# Allegro board display-002-119pm1510.brd
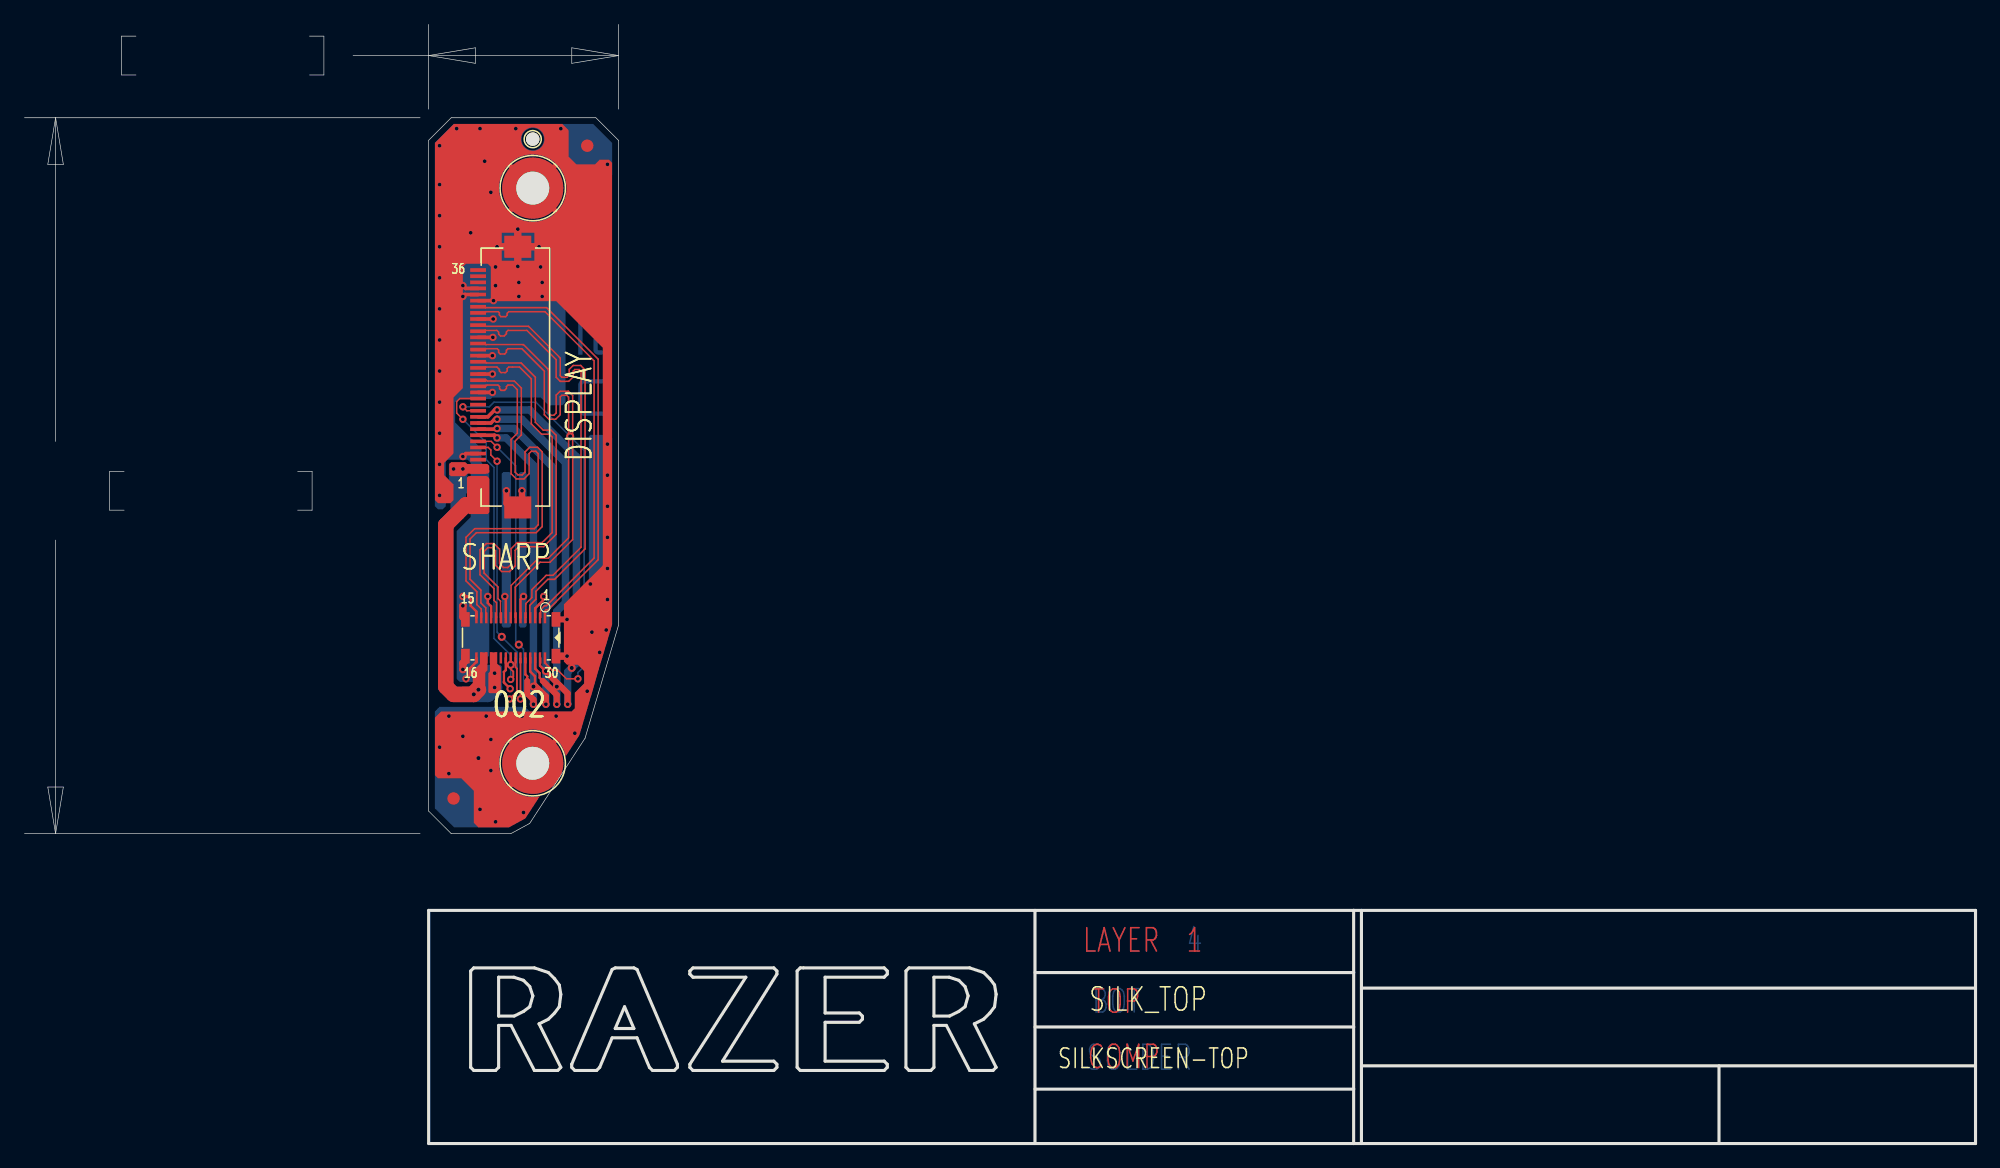
[diagram p0: board, top side]
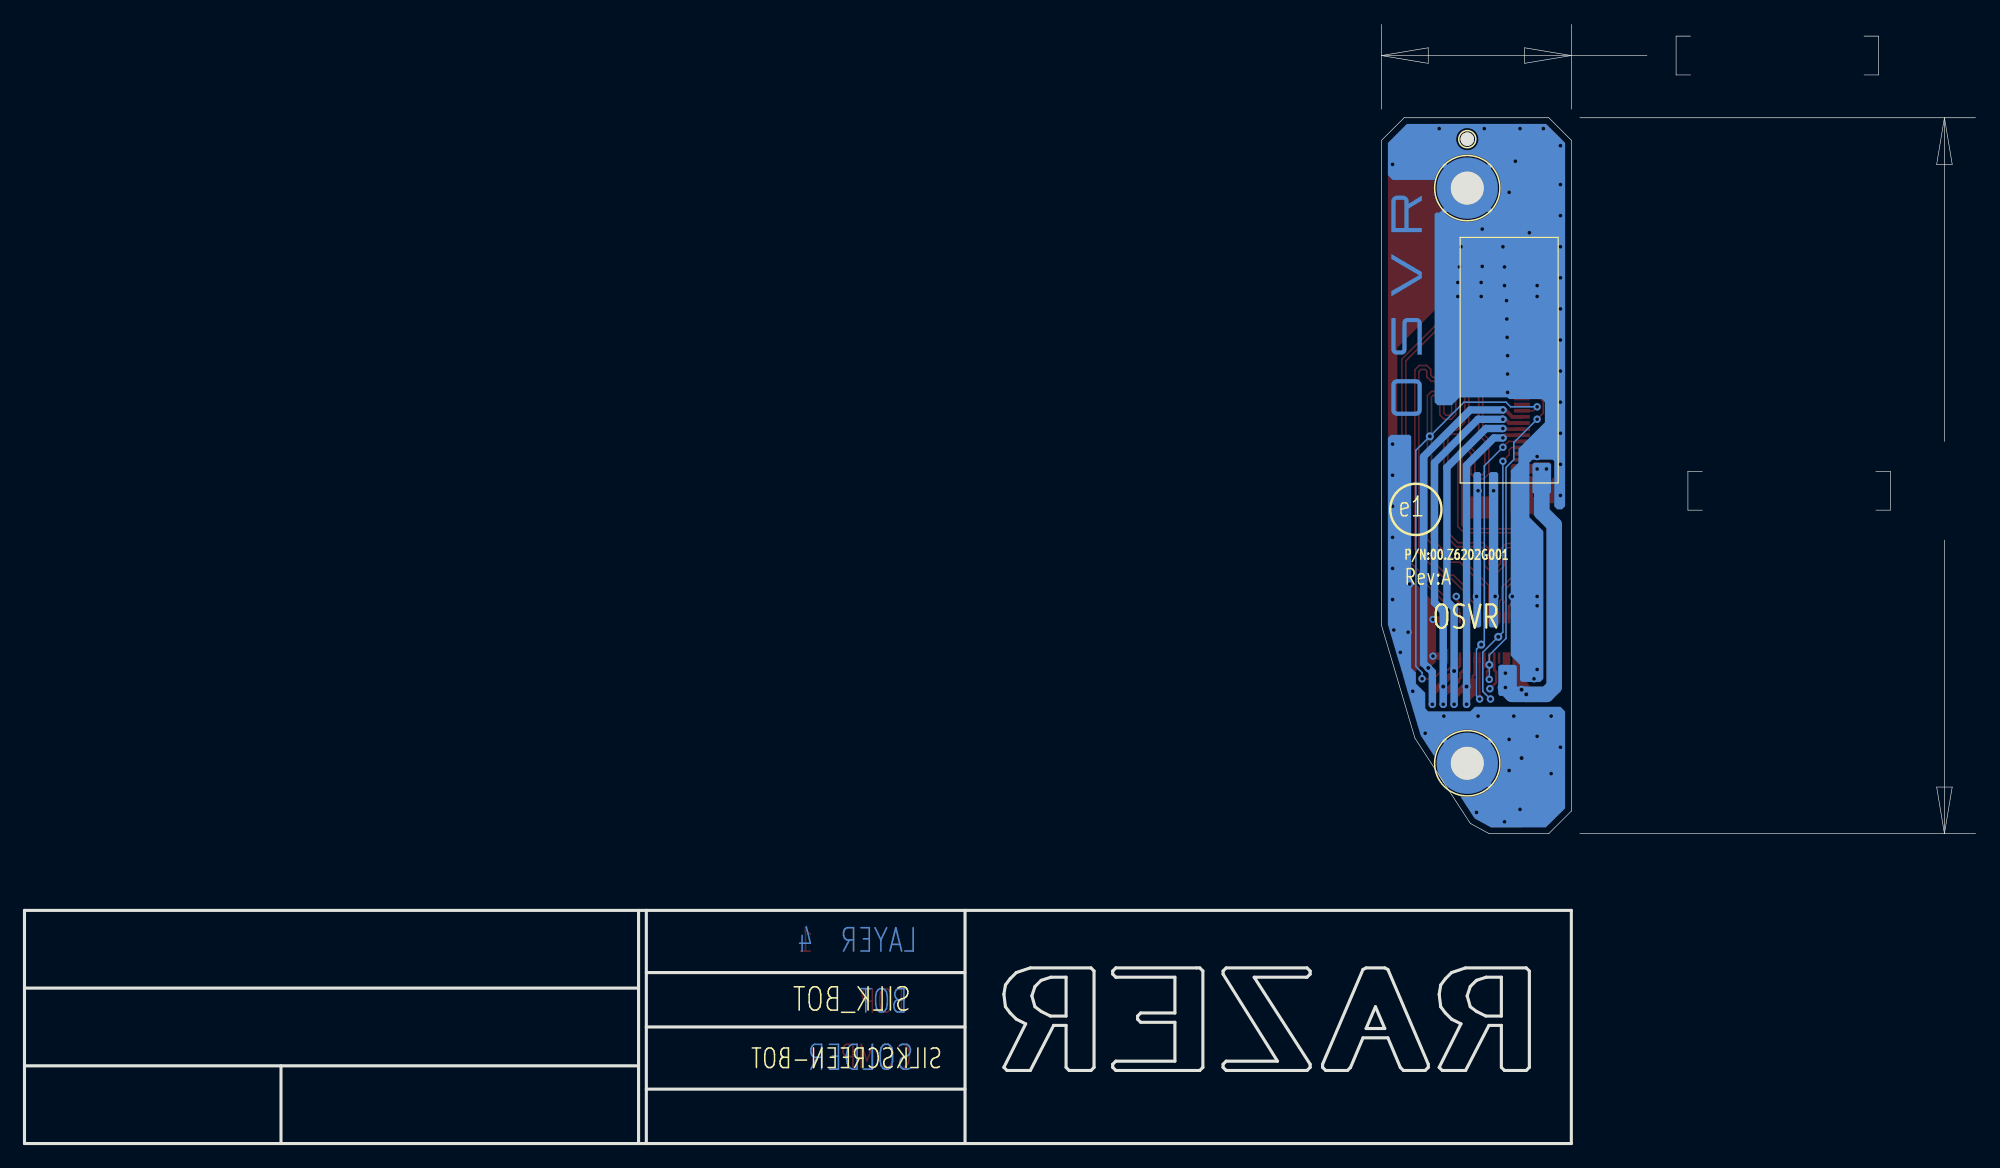
[diagram p1: board, bottom side, seen from below]

Outline 159.38 x 91.44 mm; copper layers: TOP, IN1, IN2, BOTTOM. Coordinates in mm from the lower left corner of the outline.
Outline path: 33.02,81.98 34.86,83.82 46.68,83.82 48.52,81.98 48.52,42.32 45.8,33.13 41.27,26.16 39.73,25.32 34.86,25.32 33.02,27.16 33.02,81.98

## Design rules (mm)
net group DIFFPAIR8: nets LCD1_DATAN3_T LCD1_DATAP3_T
net group DIFFPAIR9: nets LCD1_DATAN0_T LCD1_DATAP0_T
net group DIFFPAIR10: nets LCD1_CLKN_T LCD1_CLKP_T
net group DIFFPAIR11: nets LCD1_DATAN1_T LCD1_DATAP1_T
net group DIFFPAIR12: nets LCD1_DATAN2_T LCD1_DATAP2_T

## Placement (name value [footprint] x y rotation side)
J1001  FH12-36S-0.5SH(55)  [FH12-36S-0_5SH]  40.1 62.63 90 top
J1002  -  [AXT530124]  39.72 41.32 270 top
MT1001  MOUNTING HOLE  [HOLEC197D106]  41.52 78.07 0 top
MT1002  MOUNTING HOLE  [HOLEC197D106]  41.52 31.07 0 top
MT1003  MOUNTING HOLE  [HOLEC43D43N]  41.52 82.07 0 top
NOREF  -  [unnamed]  35.05 28.19 0 top
NOREF#2  -  [#2]  -129.48 156.32 90 top
NOREF#3  -  [#2]  34.86 25.32 90 top
NOREF#4  -  [#2]  -134.48 161.32 0 top
NOREF#5  -  [unnamed]  45.97 81.53 0 top
NOREF#6  -  [#2]  -134.48 161.32 0 top
NOREF#7  -  [#2]  33.02 81.98 0 top
NOREF#8  -  [#2]  33.02 0 0 top
NOREF#9  -  [#2]  -134.48 15.32 90 top
NOREF#10  -  [#2]  46.48 60.96 90 bottom

## Library data of the parts
J1001 = FH12-36S-0_5SH
J1002 = AXT530124
MT1001 MT1002 = HOLEC197D106
MT1003 = HOLEC43D43N

## Footprints (pads in the part's own frame, mm; a bottom-side part is the same pattern mirrored in y, then rotated)
AXT530124
  rect 0.914x0.203 smd: 1(-1.64,2.8) 2(-1.64,2.4) 3(-1.64,2) 4(-1.64,1.6) 5(-1.64,1.2) 6(-1.64,0.8) 7(-1.64,0.4) 8(-1.64,0) 9(-1.64,-0.4) 10(-1.64,-0.8) 11(-1.64,-1.2) 12(-1.64,-1.6) 13(-1.64,-2) 14(-1.64,-2.4) 15(-1.64,-2.8) 16(1.64,-2.8) 17(1.64,-2.4) 18(1.64,-2) 19(1.64,-1.6) 20(1.64,-1.2) 21(1.64,-0.8) 22(1.64,-0.4) 23(1.64,0) 24(1.64,0.4) 25(1.64,0.8) 26(1.64,1.2) 27(1.64,1.6) 28(1.64,2) 29(1.64,2.4) 30(1.64,2.8)
  rect 1.194x0.711 smd: M1(-1.506,3.7) M2(1.494,3.7) M3(-1.506,-3.7) M4(1.494,-3.7)
FH12-36S-0_5SH
  rect 0.305x1.295 smd: 1(-8.748,3.048) 2(-8.248,3.048) 3(-7.748,3.048) 4(-7.248,3.048) 5(-6.748,3.048) 6(-6.248,3.048) 7(-5.749,3.048) 8(-5.249,3.048) 9(-4.749,3.048) 10(-4.249,3.048) 11(-3.749,3.048) 12(-3.249,3.048) 13(-2.749,3.048) 14(-2.249,3.048) 15(-1.75,3.048) 16(-1.25,3.048) 17(-0.75,3.048) 18(-0.25,3.048) 19(0.25,3.048) 20(0.75,3.048) 21(1.25,3.048) 22(1.75,3.048) 23(2.249,3.048) 24(2.749,3.048) 25(3.249,3.048) 26(3.749,3.048) 27(4.249,3.048) 28(4.749,3.048) 29(5.249,3.048) 30(5.749,3.048) 31(6.248,3.048) 32(6.748,3.048) 33(7.248,3.048) 34(7.748,3.048) 35(8.248,3.048) 36(8.748,3.048)
  rect 1.803x2.21 smd: M1(-10.65,-0.198) M2(10.65,-0.198)
HOLEC43D43N
  round 1.092 hole 1.092 unplated: (0,0)
HOLEC197D106
  round 5.004 hole 2.692: 1(0,0)
unnamed
  round 1.016 smd: 1(0,0)

## Nets
DGND: J1001.6 J1001.16 J1001.19 J1001.22 J1001.25 J1001.28 J1001.31 J1001.32 J1001.33 J1001.M1 J1001.M2 J1002.3 J1002.6 J1002.9 J1002.12 J1002.15 J1002.16 J1002.22 J1002.M1 J1002.M2 J1002.M3 J1002.M4 MT1001.1 MT1002.1
LCD1_AVDD: J1001.10 J1002.27
LCD1_AVSS: J1001.11 J1002.28
LCD1_CLKN_T: J1001.24 J1002.7
LCD1_CLKP_T: J1001.23 J1002.8
LCD1_DATAN0_T: J1001.27 J1002.4
LCD1_DATAN1_T: J1001.21 J1002.10
LCD1_DATAN2_T: J1001.18 J1002.13
LCD1_DATAN3_T: J1001.30 J1002.1
LCD1_DATAP0_T: J1001.26 J1002.5
LCD1_DATAP1_T: J1001.20 J1002.11
LCD1_DATAP2_T: J1001.17 J1002.14
LCD1_DATAP3_T: J1001.29 J1002.2
LCD1_H-SYNC: J1001.8 J1002.25
LCD1_IO_VCC: J1001.9 J1002.26
LCD1_LEDPWM: J1001.12 J1002.29
LCD1_MARK_ID_R: J1001.15 J1002.23
LCD1_TE: J1001.7 J1002.24
LCD1_X_RESET: J1001.13 J1002.30
PIN_14_100: J1001.14
VLED_CH1+: J1001.1 J1001.2 J1002.17 J1002.18
VLED_CH1-: J1001.3 J1001.4 J1002.19 J1002.20

Pads without a net: J1001 5 34 35 36; J1002 21; NOREF 1; NOREF#5 1

## Via types
v1: diameter 0.61, hole 0.305, TOP to BOTTOM, 97 vias
v2: diameter 0.66, hole 0.33, TOP to BOTTOM, 11 vias

## Routing (per net, layer and track width the routed paths; a pad name or vN(x,y) marks a point on that pad's centre or on a via; arc(x,y) is an arc through that point)
DGND: length 126
  TOP w0.203: J1002.15 36.92,43.47 36.45,43.94 36.45,44.45 36.19,44.7 v1(35.81,44.7) ; J1002.6 40.52,44.46 v1(40.77,44.7) ; v1(37.85,44.7) 37.85,44.17 38.12,43.9 J1002.12 ; J1002.3 41.72,43.73 42.42,44.43 v1(42.42,44.7) ; v1(39.24,44.7) 39.32,44.63 J1002.9 ; v1(39.67,37.16) 39.17,37.67 39.17,38.53 39.32,38.69 J1002.22 ; J1002.16 36.92,39.36 36.37,38.81 36.37,38.28 v1(36.07,37.97)
  TOP w0.305: J1001.28 v1(38.29,67.37) ; J1001.6 36.06,56.38 v1(35.81,56.13) ; J1001.31 v1(38.31,68.87) ; J1001.25 v1(38.27,65.87) ; v1(35.81,69.22) 35.97,69.37 J1001.32 ; J1001.19 v1(38.23,62.88) ; J1001.33 36.04,69.87 v1(35.81,70.1) ; J1001.22 v1(38.23,64.37) ; v1(38.23,61.38) J1001.16
  TOP w0.381: MT1002.1 43.69,33.24 ; MT1002.1 39.35,28.9 ; MT1002.1 39.35,33.24 ; MT1001.1 43.69,80.24 ; MT1001.1 43.69,75.9 ; MT1001.1 39.35,80.24 ; MT1001.1 39.35,75.9
  TOP w0.508: v1(40.64,53.34) 40.64,52.31 J1001.M1 39.72,51.97 39.37,52.32 v1(39.37,53.34) ; J1002.M1 v1(44.32,42.83)
  TOP w0.61: J1002.M3 35.81,43.03 v1(35.81,43.94) ; J1001.M2 v1(38.61,73.28) ; J1001.M2 v1(40.3,74.72) ; J1001.M2 v1(40.3,71.67) ; J1001.M2 v1(42.04,73.28) ; J1002.M4 36.02,39.45 35.81,39.24 v1(35.81,38.73) ; v1(44.32,39.83) J1002.M2
  IN1 w0.381: MT1002.1 43.69,33.24 ; MT1002.1 39.35,33.24 ; MT1002.1 39.35,28.9 ; MT1001.1 43.69,75.9 ; MT1001.1 39.35,75.9 ; MT1001.1 43.69,80.24 ; MT1001.1 39.35,80.24
  IN2 w0.381: 39.35,75.9 MT1001.1 ; MT1001.1 43.69,80.24 ; MT1001.1 43.69,75.9 ; MT1001.1 39.35,80.24 ; 39.35,33.24 MT1002.1 ; MT1002.1 43.69,33.24 ; MT1002.1 39.35,28.9
  BOTTOM w0.381: 39.35,80.24 MT1001.1 ; MT1001.1 43.69,80.24 ; MT1001.1 43.69,75.9 ; MT1001.1 39.35,75.9 ; 39.35,33.24 MT1002.1 ; MT1002.1 39.35,28.9 ; MT1002.1 43.69,33.24
  vias: v1(33.91,81.53) v1(33.91,78.36) v1(33.91,75.82) v1(33.91,73.28) v1(33.91,70.74) v1(33.91,68.2) v1(33.91,65.66) v1(33.91,63.12) v1(33.91,60.58) v1(33.91,58.04) v1(33.91,55.5) v1(33.91,52.96) v1(33.91,32.38) v1(34.67,34.92) v1(34.67,30.23) v1(35.31,82.93) v1(35.81,33.27) v1(36.45,74.42) v1(37.21,82.93) v1(37.21,27.3) v1(37.59,80.26) v1(37.72,34.92) v1(38.1,77.72) v1(38.1,33.02) v1(38.1,30.48) v1(38.48,71.63) v1(38.48,70.1) v1(38.48,26.29) v1(40.13,82.93) v1(40.39,70.36) v1(40.39,69.22) v1(40.64,34.92) v1(40.77,27.05) v1(42.16,71.63) v1(42.29,70.36) v1(42.29,69.22) v1(43.43,34.92) v1(43.81,82.93) v1(44.96,33.53) v1(45.97,36.96) v1(46.23,45.72) v1(46.35,41.78) v1(46.99,40.13) v1(47.52,41.96) v1(47.62,80.01) v1(47.62,57.15) v1(47.62,54.61) v1(47.62,52.07) v1(47.62,49.53) v1(47.62,46.99) v1(47.62,44.45) v2(37.08,31.5)
LCD1_AVDD: length 31.4
  TOP w0.203: J1002.27 41.32,38.57 41.71,38.18 41.71,37.42
  TOP w0.305: v1(38.61,58.43) 38.56,58.38 J1001.10
  TOP w0.508: 41.71,37.42 42.6,36.53 v1(42.6,35.89)
  BOTTOM w0.61: v1(38.61,58.43) 40,58.43 43.18,55.25 43.18,44.32 42.6,43.74 v2(42.6,38.61) v1(42.6,35.89)
LCD1_AVSS: length 33.3
  TOP w0.203: 42.34,37.8 42.09,38.05 42.09,38.43 41.72,38.8 J1002.28
  TOP w0.305: J1001.11 38.1,58.88 38.41,59.18 v1(38.61,59.18)
  TOP w0.508: 42.34,37.8 43.48,36.65 v1(43.48,35.89)
  BOTTOM w0.61: v1(38.61,59.18) 40.64,59.18 44.2,55.63 44.2,44.2 43.48,43.48 v2(43.48,37.34) v1(43.48,35.89)
LCD1_CLKN_T: length 34.6
  TOP w0.127: J1001.24 37.62,65.37 37.72,65.28 40.77,65.28 42.8,63.25 42.8,59.69 42.98,59.51 43.26,59.51 43.43,59.69 43.43,61.15 43.75,61.47 44.43,61.47 44.78,61.12 44.78,49.35 42.93,47.5 42.12,47.5 40.09,45.46 40.09,43 J1002.7
LCD1_CLKP_T: length 34.6
  TOP w0.127: J1002.8 39.76,43 39.76,45.6 41.99,47.83 42.79,47.83 44.45,49.49 44.45,60.99 44.3,61.14 43.89,61.14 43.76,61.01 43.76,59.55 43.39,59.18 42.84,59.18 42.47,59.55 42.47,63.11 40.63,64.95 39.5,64.95 39.37,64.82 39.37,64.66 39.23,64.52 38.86,64.52 38.73,64.64 38.73,64.83 38.62,64.95 37.69,64.95 37.62,64.87 J1001.23
LCD1_DATAN0_T: length 34.6
  TOP w0.127: J1002.4 41.29,43 41.29,43.98 41.78,44.48 41.78,45.13 42.76,46.1 43.31,46.1 45.8,48.59 45.8,63.22 45.44,63.58 44.82,63.58 44.5,63.26 44.5,62.79 44.32,62.61 43.9,62.61 43.76,62.75 43.76,64.19 41.17,66.78 37.64,66.78 37.55,66.87 J1001.27
LCD1_DATAN1_T: length 34.6
  TOP w0.127: J1002.10 38.89,43 38.89,44.32 38.68,44.52 38.68,45.48 37.54,46.62 37.54,48.38 37.86,48.69 38.22,48.69 38.48,48.43 38.48,47.24 38.99,46.74 39.62,46.74 40.08,47.19 40.08,48.46 40.39,48.77 42.42,48.77 43.43,49.78 43.43,57.87 43.01,58.29 42.38,58.29 41.73,58.94 41.73,62.62 40.57,63.78 37.75,63.78 37.66,63.87 J1001.21
LCD1_DATAN2_T: length 34.6
  TOP w0.127: J1001.18 37.74,62.38 37.81,62.31 40.01,62.31 40.59,61.73 40.59,57.9 40.08,57.39 40.08,54.86 40.31,54.64 40.67,54.64 40.89,54.86 40.89,56.52 41.27,56.9 41.91,56.9 42.29,56.52 42.29,50.41 41.79,49.91 36.92,49.91 36.4,49.39 36.4,46.11 37.29,45.22 37.29,44.17 37.69,43.77 37.69,43 J1002.13
LCD1_DATAN3_T: length 34.6
  TOP w0.127: J1001.30 37.6,68.37 37.67,68.3 42.66,68.3 46.86,64.09 46.86,47.7 42.77,43.61 42.62,43.61 42.49,43.49 42.49,42.99 J1002.1
LCD1_DATAP0_T: length 34.6
  TOP w0.127: J1001.26 37.57,66.37 37.64,66.45 38.58,66.45 38.73,66.29 38.73,66.14 38.89,65.99 39.19,65.99 39.37,66.17 39.37,66.32 39.5,66.45 41.04,66.45 43.43,64.05 43.43,62.61 43.76,62.28 44.46,62.28 44.83,62.65 44.83,63.12 44.96,63.25 45.3,63.25 45.47,63.08 45.47,48.73 43.17,46.43 42.62,46.43 41.45,45.26 41.45,44.62 40.95,44.12 40.95,43 J1002.5
LCD1_DATAP1_T: length 34.6
  TOP w0.127: J1002.11 38.56,43 38.56,44.19 38.35,44.39 38.35,45.34 37.21,46.48 37.21,48.51 37.72,49.02 38.35,49.02 38.81,48.56 38.81,47.38 39.13,47.07 39.49,47.07 39.75,47.33 39.75,48.6 40.25,49.1 42.28,49.1 43.1,49.92 43.1,57.73 42.88,57.96 42.24,57.96 41.4,58.8 41.4,62.48 40.44,63.45 39.56,63.45 39.43,63.32 39.43,63.13 39.29,62.99 38.93,62.99 38.8,63.12 38.8,63.25 38.6,63.45 37.69,63.45 37.62,63.38 J1001.20
LCD1_DATAP2_T: length 34.6
  TOP w0.127: J1002.14 37.32,43.67 36.96,44.03 36.96,45.08 36.07,45.97 36.07,49.53 36.78,50.24 41.66,50.24 41.96,50.55 41.96,56.38 41.77,56.57 41.41,56.57 41.22,56.38 41.22,54.73 40.8,54.31 40.17,54.31 39.75,54.73 39.75,57.53 40.26,58.04 40.26,61.59 39.88,61.98 39.5,61.98 39.37,61.85 39.37,61.7 39.22,61.54 38.94,61.54 38.81,61.67 38.81,61.85 38.68,61.98 37.77,61.98 37.67,61.88 J1001.17
LCD1_DATAP3_T: length 34.6
  TOP w0.127: J1001.29 37.6,67.87 37.69,67.97 38.71,67.97 38.8,67.88 38.8,67.69 38.93,67.56 39.31,67.56 39.43,67.69 39.43,67.84 39.56,67.97 42.52,67.97 46.53,63.96 46.53,47.84 42.64,43.94 42.48,43.94 42.16,43.62 42.16,43 J1002.2
LCD1_H-SYNC: length 26.7
  TOP w0.127: v1(38.61,56.9) 38.13,57.38 J1001.8
  TOP w0.152: J1002.25 40.52,36.33 v1(40.51,36.32)
  BOTTOM w0.127: v1(40.51,36.32) 40.77,36.58 40.77,40.39 v2(40.39,40.77) 40.13,41.02 40.13,55.37 v1(38.61,56.9)
LCD1_IO_VCC: length 29.1
  TOP w0.203: 41.07,37.8 41.07,38.18 40.92,38.33 J1002.26
  TOP w0.305: J1001.9 38.39,57.88 v1(38.61,57.66)
  TOP w0.508: v1(41.58,35.89) 41.58,36.27 41.07,36.78 41.07,37.8
  BOTTOM w0.61: v1(41.58,35.89) v2(41.58,37.34) 41.58,55.42 39.34,57.66 v1(38.61,57.66)
LCD1_LEDPWM: length 35.1
  TOP w0.203: 42.98,38.18 42.12,39.03 J1002.29
  TOP w0.305: v1(38.61,59.94) 38.41,59.94 37.85,59.38 J1001.12
  TOP w0.508: v1(44.37,35.89) 44.37,36.78 42.98,38.18
  BOTTOM w0.61: v1(44.37,35.89) 44.37,38.53 v2(44.7,38.86) 45.08,39.24 45.08,56.13 41.27,59.94 v1(38.61,59.94)
LCD1_MARK_ID_R: length 28.3
  TOP w0.127: v1(35.81,59.18) 35.31,59.69 35.31,60.62 35.56,60.88 J1001.15
  TOP w0.152: J1002.23 39.72,38.77 39.93,38.56 39.93,38.13 v1(39.72,37.92)
  BOTTOM w0.127: v1(35.81,59.18) 37.72,57.28 37.72,55.88 38.35,55.25 38.35,41.27 39.72,39.91 v2(39.72,39.12) v1(39.72,37.92)
LCD1_TE: length 26.3
  TOP w0.127: v1(38.61,55.75) 38.1,56.26 38.1,56.67 37.89,56.88 J1001.7
  TOP w0.152: v1(39.62,36.32) 40.23,36.93 40.23,38.81 40.12,38.92 J1002.24
  BOTTOM w0.127: v1(39.62,36.32) 40.26,36.96 40.26,40.13 v2(38.99,41.4) 38.61,41.78 v1(38.61,55.75)
LCD1_X_RESET: length 35.6
  TOP w0.127: 43.56,38.69 44.27,37.97 v1(45.21,37.97) ; v1(35.81,60.2) 36.14,59.88 J1001.13
  TOP w0.152: J1002.30 42.52,39.27 43.1,38.69 43.56,38.69
  BOTTOM w0.127: v1(35.81,60.2) 37.97,60.2 38.35,60.58 41.78,60.58 v2(44.58,57.78) 45.72,56.64 45.72,38.99 45.21,38.48 v1(45.21,37.97)
VLED_CH1+: length 19.5
  TOP w1.27: 36.96,52.2 36.07,52.2 34.42,50.55 34.42,37.34 35.05,36.7 36.7,36.7 v2(37.08,37.08)
VLED_CH1-: length 21.5
  BOTTOM w1.27: 35.43,53.97 35.43,51.56 34.42,50.55 34.42,37.34 35.05,36.7 v2(36.7,36.7) 37.85,36.7 v1(38.4,37.26)
  vias: v1(35.05,55.12) v1(35.81,55.12) v1(38.4,38.43)

## Copper pours and planes (outline as drawn; the poured copper is in the pictures)
DGND on TOP (solid shape): outline of 353 points within 33.53,25.83 48.01,83.31
DGND on BOTTOM (solid shape): 39.75,54.74 39.75,42.29 39.62,42.16 39.12,42.16 38.99,42.29 38.99,54.74 39.12,54.86 39.62,54.86
DGND on BOTTOM (solid shape): 41.02,54.74 41.02,42.29 40.89,42.16 40.51,42.16 40.39,42.29 40.39,54.74 40.51,54.86 40.89,54.86
DGND on BOTTOM (solid shape): 48.01,57.66 48.01,42.42 47.83,41.81 47.73,41.48 47.55,40.87 47.52,40.77 47.47,40.61 47.35,40.18 47.27,39.93 47.17,39.6 47.09,39.34 46.96,38.94 46.91,38.73 46.86,38.58 46.46,37.16 46.43,37.06 46.25,36.47 45.34,33.4 45.29,33.3 44.22,31.65 39.21,32.57 42.09,28.37 40.92,26.57 39.57,25.83 35.1,25.83 33.53,27.38 33.53,35.31 33.91,35.69 40.89,35.69 41.27,35.31 44.7,35.31 44.96,35.56 44.96,36.83 45.72,37.59 45.72,38.48 46.1,38.86 46.1,57.78 46.23,57.91 47.75,57.91
DGND on BOTTOM (solid shape): outline of 205 points within 33.53,37.72 48.01,83.31
DGND on IN1 (solid shape): outline of 1186 points within 33.53,25.83 48.01,83.31
DGND on IN2 (solid shape): outline of 1186 points within 33.53,25.83 48.01,83.31
Net_5 on BOTTOM (solid shape): outline of 87 points within 45.23,59.46 47.73,62.46
Net_6 on BOTTOM (solid shape): 46.44,67.46 46.71,67.34 46.83,67.06 46.83,64.88 46.86,64.83 46.91,64.81 47.29,64.81 47.35,64.84 47.38,64.89 47.38,67.46 47.73,67.46 47.73,64.9 47.6,64.59 47.29,64.46 46.86,64.46 46.59,64.59 46.48,64.87 46.48,67.05 46.45,67.1 46.4,67.11 45.65,67.12 45.61,67.09 45.59,67.04 45.59,64.46 45.23,64.46 45.23,67.03 45.37,67.34 45.67,67.46
Net_7 on BOTTOM (solid shape): 47.73,72.28 45.46,70.95 47.73,69.65 47.73,69.21 45.23,70.71 45.23,71.22 47.73,72.7
Net_8 on BOTTOM (solid shape): 47.25,77.46 47.28,77.46 47.35,77.45 47.41,77.43 47.47,77.4 47.52,77.37 47.57,77.33 47.61,77.28 47.65,77.23 47.68,77.18 47.71,77.12 47.72,77.06 47.73,76.99 47.73,76.96 47.73,74.46 45.23,74.46 45.23,74.81 46.31,74.81 46.31,76.39 45.23,77.05 45.23,77.46 46.3,76.8 46.3,76.98 46.65,76.98 46.65,74.81 47.38,74.81 47.38,76.97 47.38,76.99 47.37,77.02 47.36,77.05 47.34,77.07 47.31,77.09 47.28,77.11 47.25,77.11 47.23,77.11 46.78,77.11 46.77,77.11 46.73,77.1 46.7,77.08 46.68,77.06 46.66,77.03 46.65,77 46.65,76.98 46.3,76.98 46.3,77.03 46.31,77.06 46.33,77.13 46.35,77.19 46.38,77.24 46.43,77.29 46.47,77.34 46.52,77.38 46.58,77.41 46.64,77.43 46.7,77.45 46.77,77.46 46.8,77.46
VLED_CH1+ on TOP (solid shape): 37.97,54.36 37.97,51.56 37.85,51.44 36.32,51.44 36.14,51.61 36.14,54.41 36.27,54.53 37.8,54.53
VLED_CH1+ on TOP (solid shape): 37.82,38.66 37.64,38.48 37.64,36.83 36.88,36.07 35.79,36.07 35.79,37.34 36.32,37.34 36.63,37.64 36.63,38.61 37.21,39.19 37.21,40.13 37.82,40.13
VLED_CH1- on TOP (solid shape): 36.17,55.52 37.82,55.52 37.97,55.37 37.97,54.86 37.85,54.74 36.19,54.74 35.99,54.53 34.82,54.53 34.7,54.66 34.7,55.52 34.85,55.68 36.02,55.68
VLED_CH1- on TOP (solid shape): 38.61,39.22 38.91,38.92 38.91,37.36 38.91,36.91 38.81,36.8 37.97,36.8 37.9,36.88 37.9,37.31 37.9,38.43 38.02,38.56 38.02,40.13 38.61,40.13
VLED_CH1- on BOTTOM (solid shape): 36.19,55.5 36.19,53.21 36.07,53.09 34.8,53.09 34.67,53.21 34.67,55.5 34.8,55.63 36.07,55.63
VLED_CH1- on BOTTOM (solid shape): 38.99,38.99 38.99,36.7 38.86,36.58 37.59,36.58 37.46,36.7 37.46,38.99 37.59,39.12 38.86,39.12

## Text on the board
Ref Des/Silkscreen Bottom: P/N:00.Z6202G001 | Rev:A | e1 | OSVR
Board Geometry/Outline: 1.Default 5MIL IS 55 OHM +/- 10% | 2.MIPI SIGNALS IS BLUE 5:8 MIL DIFFERENTIAL 100 OHM +/- 10% | TRACE:SPACE
Ref Des/Silkscreen Top: SHARP | 002 | DISPLAY
NCLEGEND-1-4: FIGURE | SIZE | 12.0 | 106.0 | 43.0 | DRILL CHART: TOP to BOTTOM | ALL UNITS ARE IN MILS | PLATED | NON-PLATED | QTY | 97 | 2 | 1
User.11: 1.00 | 1 | 30 | 36 | 1.00 THICKNESS | 4.51 | 26.00 | 71.00 | 2- dia2.40 HOLE
User.18: .07874" | .028" | .200" | .03937" | .0120" | CNC | VCUT
User.19: 8.50
